# Altium PCB EQDirect.PcbDoc
Units mm, origin at the board's own origin, x right, y up, seen from the top; angles counter-clockwise.
Board outline 15 x 20 mm, 2 copper layers (Top Layer, Bottom Layer), stack 1.471 mm thick; 15 components, 12 nets, 64 pads, 20 vias.
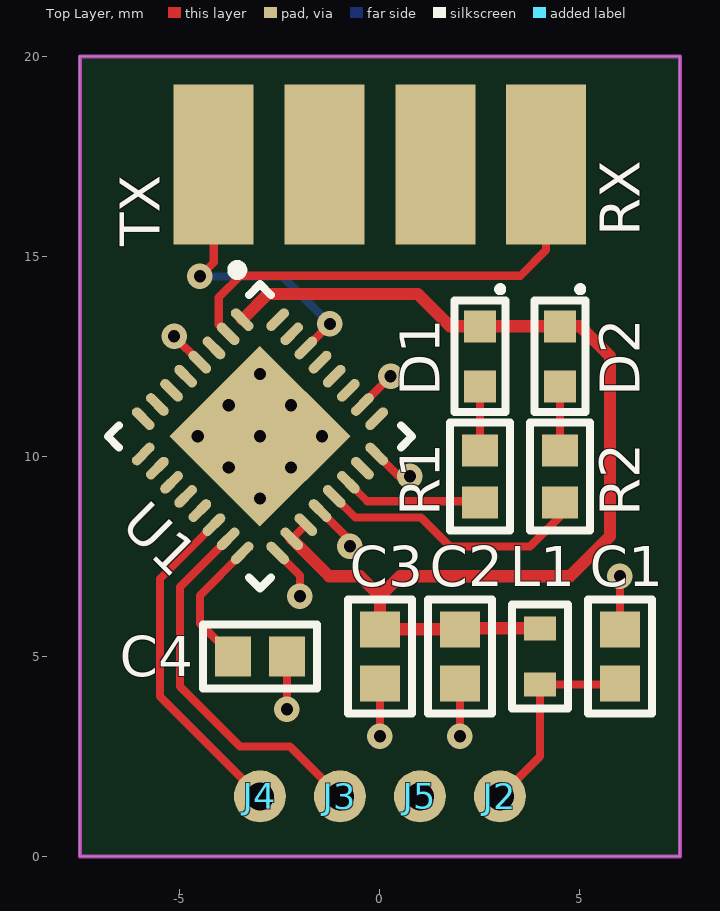
[diagram p0: Top Layer view]
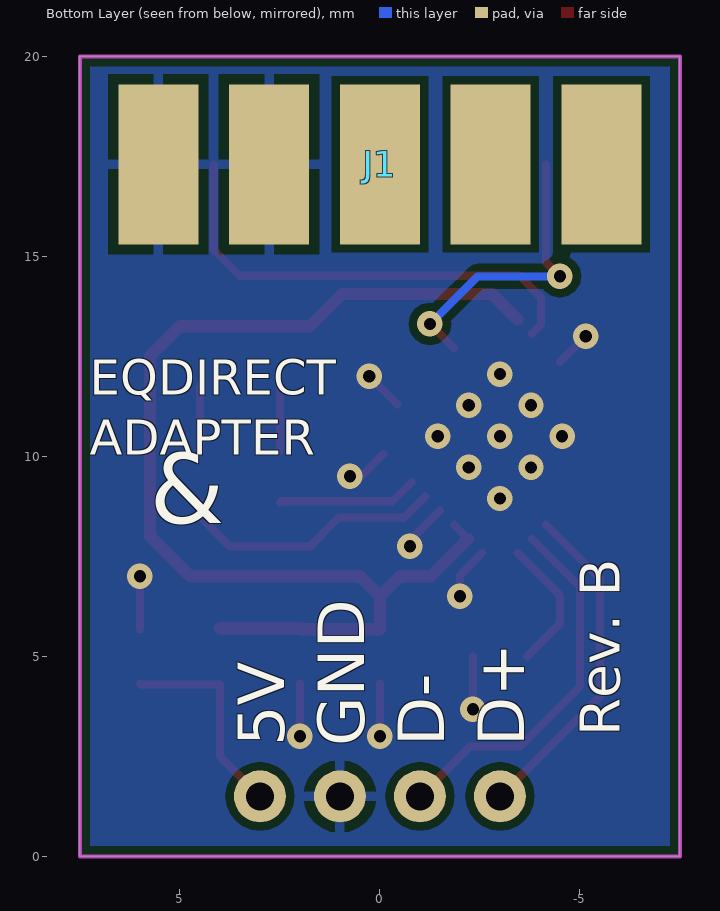
[diagram p1: Bottom Layer view, seen from below]
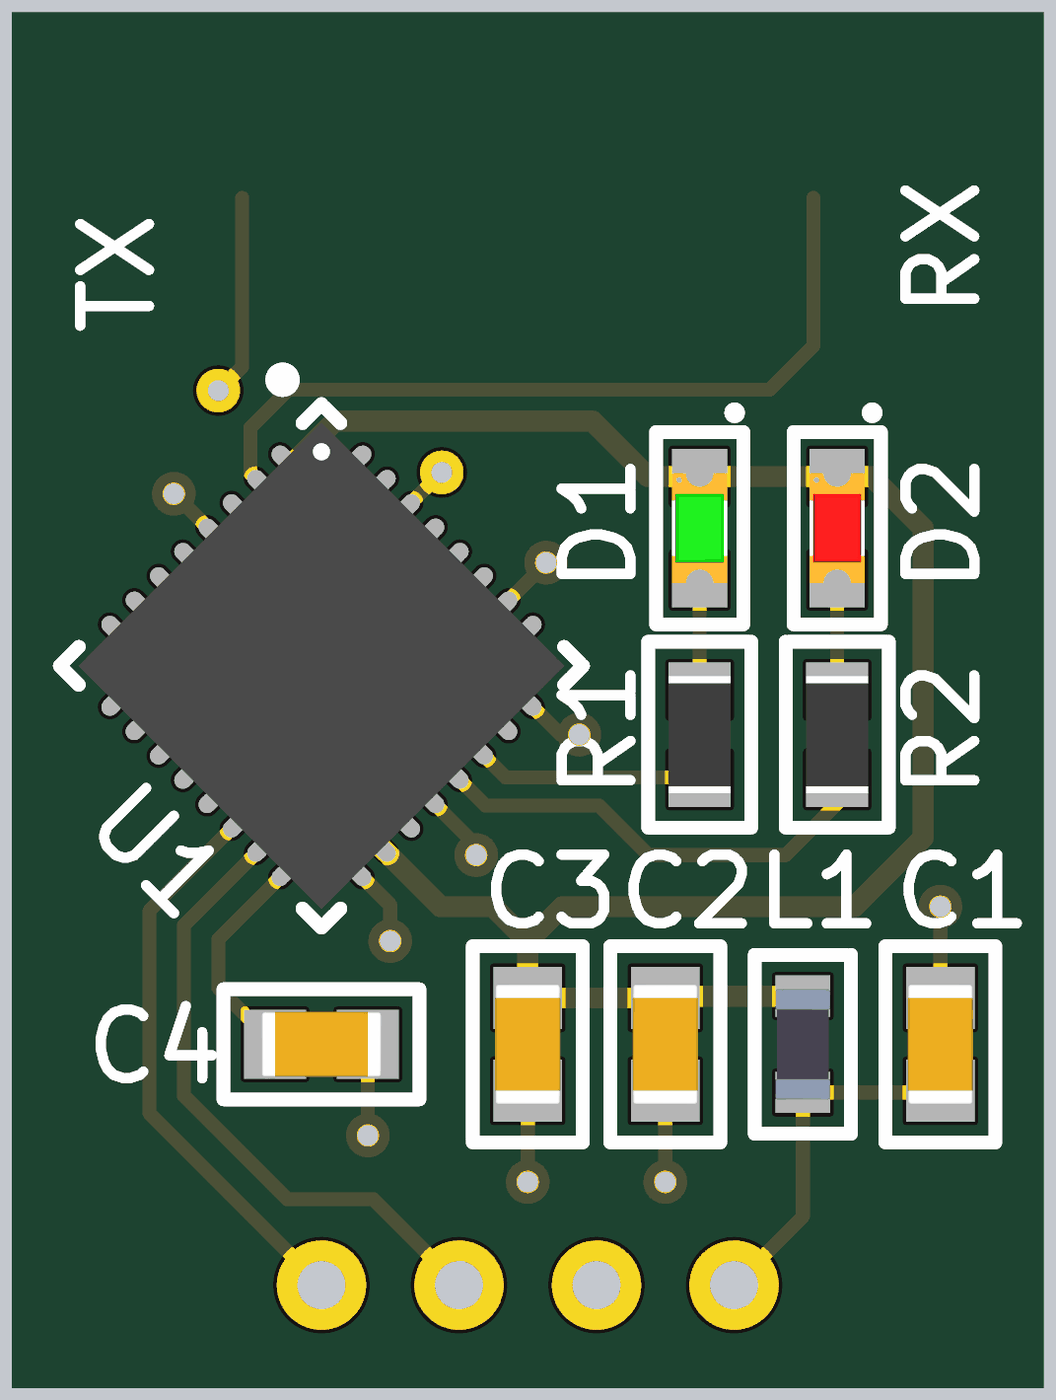
[diagram p2: 3D render of the assembled board from above, using the file's embedded part models]

## Layer stack, top to bottom
Top Solder: solder mask 0.0102, Solder Resist, Dk 3.5
Top Layer: signal copper 0.0356
Dielectric 1: dielectric 1.4, FR-4, Dk 4.8
Bottom Layer: signal copper 0.0356
Bottom Solder: solder mask 0.0102, Solder Resist, Dk 3.5

## Board outline
-7.5,0 7.5,0 7.5,20 -7.5,20

## Design rules (kind name [scope] priority, off if disabled: settings)
Clearance [All] p1: gap=0.203 ignorepadtopadclearanceinfootprint=FALSE
HoleSize [All] p1: absolutevalues=TRUE maxlimit=2.54 minlimit=0.3 maxpercent=80.000 minpercent=20.000
MinimumSolderMaskSliver [All] p1: minsoldermaskwidth=0.1
PolygonConnect PolygonConnect_VIA [IsVia] p1: connectstyle=Direct reliefconductorwidth=0.254 reliefentries=4 polygonreliefangle="90 Angle" airgapwidth=0.254
PolygonConnect [All] p2: connectstyle=Relief reliefconductorwidth=0.254 reliefentries=4 polygonreliefangle="90 Angle" airgapwidth=0.254
RoutingVias [All] p1: holewidth=0.305 width=0.635 viastyle="Through Hole" minholewidth=0.3 minwidth=0.508 maxholewidth=0.381 maxwidth=0.635
SilkToSilkClearance [All] p1: silktosilkclearance=0
SilkToSolderMaskClearance [IsPad] p1: minsilkscreentomaskgap=0.1 clearancetoexposedcopper=TRUE
SolderMaskExpansion [All] p1: expansion=0.051
Width [All] p1: maxlimit=0.305 minlimit=0.203 preferedwidth=0.203
26 further rules are at their usual default settings.

## Components (designator, comment, footprint, x,y, rotation, side; value= is the part's Value field where it differs from the comment)
C1 "100nF" C0603 6,5 r270 top
C2 "4u7" C0603 2,5 r90 top
C3 "100nF" C0603 0,5 r90 top
C4 "100nF" C0603 -3,5 r180 top
D1 "GREEN" LED_0603_GREEN 2.5,12.5 r270 top
D2 "RED" LED_0603_RED 4.5,12.5 r270 top
J1 "DB9 male edge connector" DB9-M-EDGE 0,26.3 r180 bottom
J2 "TH_PAD" TH_PAD 3,1.5 r0 top
J3 "TH_PAD" TH_PAD -1,1.5 r180 top
J4 "TH_PAD" TH_PAD -3,1.5 r180 top
J5 "TH_PAD" TH_PAD 1,1.5 r0 top
L1 "MZ1608-102Y" L0603 4,5 r270 top
R1 "280R" R0603 2.5,9.5 r90 top
R2 "280R" R0603 4.5,9.5 r90 top
U1 "FT232RQ" QFN50P500X500X100_HS-33N -3,10.5 r315 top

## Footprints (in the part's own frame and the unit in brackets; to place one, negate y for a bottom-side part, rotate by r counter-clockwise, add the part's x,y. Pads: shape width x height; smd on the part's side, far side on the other; paste and mask are expansions set on the pad)
C0603 [mm] "Chip Capacitor, Body 2.0x1.2mm, Height 1.0mm, IPC Medium Density"
  rect 0.9x1 smd: 1(-0.675,0) 2(0.675,0)
  silkscreen extent -1.43,-0.8 1.43,0.8, body extent -0.87,-0.47 0.88,0.48, height 0.95
DB9-M-EDGE [mm]
  rect 2x4 smd: 1(5.54,-9) 2(2.77,-9) 3(0,-9) 4(-2.77,-9) 5(-5.54,-9)
  rect 2x4 smd far side: 6(4.155,-9) 7(1.385,-9) 8(-1.385,-9) 9(-4.155,-9)
  body extent -15.41,-10.9 15.4,6.3, height 5.28
L0603 [mm]
  rect 0.6x0.8 smd: 1(-0.7,0) 2(0.7,0)
  silkscreen extent -1.3,-0.7 1.3,0.7, body extent -0.8,-0.4 0.8,0.4, height 0.8
LED_0603_GREEN [mm] "OSRAM Chipled 0805 GREEN"
  rect 0.8x0.8 smd: 1(-0.75,0) 2(0.75,0)
  silkscreen extent -1.73,-0.64 1.4,0.64, body extent -0.8,-0.4 0.8,0.4, height 0.6
LED_0603_RED [mm] "OSRAM Chipled 0805 RED"
  rect 0.8x0.8 smd: 1(-0.75,0) 2(0.75,0)
  silkscreen extent -1.73,-0.64 1.4,0.64, body extent -0.8,-0.4 0.8,0.4, height 0.6
QFN50P500X500X100_HS-33N [mm] "QFN, 32-Leads, Body 5,00x5,00mm, Pitch 0,50mm, Thermal Pad 3,20x3,20mm, IPC Medium Density"
  oval 0.7x0.25 smd: 1(-2.375,1.75) 2(-2.375,1.25) 3(-2.375,0.75) 4(-2.375,0.25) 5(-2.375,-0.25) 6(-2.375,-0.75) 7(-2.375,-1.25) 8(-2.375,-1.75) 17(2.375,-1.75) 18(2.375,-1.25) 19(2.375,-0.75) 20(2.375,-0.25) 21(2.375,0.25) 22(2.375,0.75) 23(2.375,1.25) 24(2.375,1.75)
  oval 0.25x0.7 smd: 9(-1.75,-2.375) 10(-1.25,-2.375) 11(-0.75,-2.375) 12(-0.25,-2.375) 13(0.25,-2.375) 14(0.75,-2.375) 15(1.25,-2.375) 16(1.75,-2.375) 25(1.75,2.375) 26(1.25,2.375) 27(0.75,2.375) 28(0.25,2.375) 29(-0.25,2.375) 30(-0.75,2.375) 31(-1.25,2.375) 32(-1.75,2.375)
  rect 3.2x3.2 smd: 33(0,0)
  silkscreen extent -3.46,-2.69 2.69,2.69, body extent -2.5,-2.5 2.51,2.51, height 1
R0603 [mm] "Chip Resistor, 2-Leads, Body 1,60x0,80mm, IPC Medium Density"
  rect 0.8x0.9 smd: 1(-0.65,0) 2(0.65,0)
  silkscreen extent -1.35,-0.75 1.35,0.75, body extent -0.85,-0.45 0.85,0.45, height 0.55
TH_PAD [mm]
  round 1.3 hole 0.7: 1(0,0)

## Part data
C1 C3 C4: library part C0603C104K5RACTU, "CAP CER 0.1UF 50V X7R 0603", Capacitance=0.10µF, Manufacturer=Kemet, Operating Temperature="-55°C ~ 125°C", Package / Case="0603 (1608 Metric)", Ratings=-, Supplier Part Number 1=399-5089-1-ND, Temperature Coefficient=X7R, Tolerance=±10%, Voltage - Rated=50V, Applications="General Purpose", Category=Capacitors, ComponentLink1Description=http://www.kemet.com/docfinder?Partnumber=C0603C104K5RACTU, ComponentLink1URL=http://www.kemet.com/docfinder?Partnumber=C0603C104K5RACTU, Features=-, Height - Seated (Max)=-, Lead Spacing=-, Lead Style=-, Manufacturer Part Number=C0603C104K5RACTU, Mounting Type="Surface Mount, MLCC", Packaging="Cut Tape (CT)", Part Number=C0603C104K5RACTU, Pricing 1="1=0.09, 10=0.037, 50=0.0198, 100=0.0167, 250=0.01372, 500=0.01174, 1000=0.00914 (EUR)", RoHS="RoHS Compliant", Size / Dimension="0.063\" L x 0.031\" W (1.60mm x 0.80mm)", Stock 1=1628757, Supplier 1=Digi-Key, Thickness (Max)="0.034\" (0.87mm)"
C2: library part GRM188R6YA475KE15D, "CAP CER 4.7UF 35V X5R 0603", Capacitance=4.7µF, Manufacturer="Murata Electronics North America", Operating Temperature="-55°C ~ 85°C", Package / Case="0603 (1608 Metric)", Ratings=-, Supplier Part Number 1=490-7205-2-ND, Temperature Coefficient=X5R, Tolerance=±10%, Voltage - Rated=35V, Applications="General Purpose", Category=Capacitors, ComponentLink1Description=http://www.murata.com/~/media/webrenewal/support/library/catalog/products/capacitor/mlcc/c02e.ashx, ComponentLink1URL=http://www.murata.com/~/media/webrenewal/support/library/catalog/products/capacitor/mlcc/c02e.ashx, Features=-, Height - Seated (Max)=-, Lead Spacing=-, Lead Style=-, Manufacturer Part Number=GRM188R6YA475KE15D, Mounting Type="Surface Mount, MLCC", Packaging="Tape & Reel (TR)", Part Number=GRM188R6YA475KE15D, Part Status=Active, Pricing 1="4000=0.05995, 8000=0.05671, 12000=0.05379, 28000=0.05185, 100000=0.04294 (EUR)", RoHS="RoHS Compliant", Size / Dimension="0.063\" L x 0.031\" W (1.60mm x 0.80mm)", Stock 1=428000, Supplier 1=Digi-Key, Thickness (Max)="0.031\" (0.80mm)"
D1: library part LTST-C190KGKT, "LED GREEN CLEAR 0603 SMD", Color=Green, Current - Test=20mA, Lens Color=Colorless, Manufacturer="Lite-On Inc.", Millicandela Rating=35mcd, Package / Case="0603 (1608 Metric)", Supplier Part Number 1=160-1435-1-ND, Voltage - Forward (Vf) (Typ)=2V, Category=Optoelectronics, ComponentLink1Description=http://optoelectronics.liteon.com/upload/download/DS22-2000-074/S_110_LTST-C190KGKT.pdf, ComponentLink1URL=http://optoelectronics.liteon.com/upload/download/DS22-2000-074/S_110_LTST-C190KGKT.pdf, Features=-, Height (Max)=0.80mm, Lens Style/Size="Rectangle with Flat Top, 1.10mm x 0.80mm", Lens Transparency=Clear, Manufacturer Part Number=LTST-C190KGKT, Mounting Type="Surface Mount", Packaging="Cut Tape (CT)", Part Number=LTST-C190KGKT, Pricing 1="1=0.24, 10=0.176, 25=0.1296, 100=0.0926, 250=0.063, 500=0.05556, 1000=0.04353 (EUR)", RoHS="RoHS Compliant", Size / Dimension="1.60mm L x 0.80mm W", Stock 1=1245030, Supplier 1=Digi-Key, Viewing Angle=130°, Wavelength - Dominant=571nm, Wavelength - Peak=574nm
D2: library part LTST-C190KRKT, "LED RED CLEAR 0603 SMD", Color=Red, Current - Test=20mA, Lens Color=Colorless, Manufacturer="Lite-On Inc.", Millicandela Rating=99mcd, Package / Case="0603 (1608 Metric)", Supplier Part Number 1=160-1436-1-ND, Voltage - Forward (Vf) (Typ)=2V, Category=Optoelectronics, ComponentLink1Description=http://optoelectronics.liteon.com/upload/download/DS-22-99-0151/S_110_LTST-C190KRKT.pdf, ComponentLink1URL=http://optoelectronics.liteon.com/upload/download/DS-22-99-0151/S_110_LTST-C190KRKT.pdf, Features=-, Height (Max)=0.80mm, Lens Style/Size="Rectangle with Flat Top, 1.10mm x 0.80mm", Lens Transparency=Clear, Manufacturer Part Number=LTST-C190KRKT, Mounting Type="Surface Mount", Packaging="Cut Tape (CT)", Part Number=LTST-C190KRKT, Pricing 1="1=0.24, 10=0.176, 25=0.1296, 100=0.0926, 250=0.063, 500=0.05556, 1000=0.04353 (EUR)", RoHS="RoHS Compliant", Size / Dimension="1.60mm L x 0.80mm W", Stock 1=1183099, Supplier 1=Digi-Key, Viewing Angle=130°, Wavelength - Dominant=631nm, Wavelength - Peak=639nm
J1: library part DB9_M_EDGE
L1: "FERRITE BEAD 1 KOHM 0603 1LN", Current Rating (Max)=100mA, DC Resistance (DCR) (Max)="600 mOhm", Impedance @ Frequency="1 kOhm @ 100MHz", Manufacturer="Bourns Inc.", Operating Temperature="-55°C ~ 125°C", Package / Case="0603 (1608 Metric)", Ratings=-, Supplier Part Number 1=MZ1608-102YCT-ND, Category=Filters, ComponentLink1Description=http://www.bourns.com/docs/Product-Datasheets/mgmumz.pdf, ComponentLink1URL=http://www.bourns.com/docs/Product-Datasheets/mgmumz.pdf, Filter Type="Power, Signal Line", Height (Max)="0.039\" (1.00mm)", Manufacturer Part Number=MZ1608-102Y, Mounting Type="Surface Mount", Number of Lines=1, Packaging="Cut Tape (CT)", Part Number=MZ1608-102Y, Part Status=Active, Pricing 1="1=0.09, 10=0.049, 25=0.0444, 50=0.0402, 100=0.0295, 250=0.02144, 500=0.01966, 1000=0.01696 (EUR)", RoHS="RoHS Compliant", Size / Dimension="0.063\" L x 0.031\" W (1.60mm x 0.80mm)", Stock 1=33555, Supplier 1=Digi-Key
R1 R2: library part RC0603FR-07280RL, "RES SMD 280 OHM 1% 1/10W 0603", Manufacturer=Yageo, Operating Temperature="-55°C ~ 155°C", Package / Case="0603 (1608 Metric)", Power (Watts)="0.1W, 1/10W", Resistance (Ohms)=280, Supplier Device Package=0603, Supplier Part Number 1=311-280HRCT-ND, Temperature Coefficient=±100ppm/°C, Tolerance=±1%, Category=Resistors, ComponentLink1Description=http://www.yageo.com/documents/recent/PYu-RC_Group_51_RoHS_L_6.pdf, ComponentLink1URL=http://www.yageo.com/documents/recent/PYu-RC_Group_51_RoHS_L_6.pdf, Composition="Thick Film", Failure Rate=-, Features="Moisture Resistant", Height - Seated (Max)="0.022\" (0.55mm)", Manufacturer Part Number=RC0603FR-07280RL, Packaging="Cut Tape (CT)", Part Number=RC0603FR-07280RL, Part Status=Active, Pricing 1="1=0.09, 10=0.012, 25=0.0088, 50=0.0066, 100=0.0049, 250=0.00372, 500=0.00298, 1000=0.0022 (EUR)", RoHS="RoHS Compliant", Size / Dimension="0.063\" L x 0.031\" W (1.60mm x 0.80mm)", Stock 1=47, Supplier 1=Digi-Key
U1: library part FT232RQ-REEL, "IC USB FS SERIAL UART 32-QFN", Case/Package="QFN EP", Manufacturer=FTDI, Max Operating Temperature=85°C, Max Supply Voltage=5.25V, Min Operating Temperature=-40°C, Min Supply Voltage=3.3V, Operating Supply Current=15mA, Operating Supply Voltage=5V, Package Quantity=6000, Supplier Part Number 1=768-1008-1-ND, ComponentLink1Description=https://datasheet.ciiva.com/1505/1647396-1505445.pdf, ComponentLink1URL=https://datasheet.ciiva.com/1505/1647396-1505445.pdf, ComponentLink2Description=https://datasheet.ciiva.com/26841/ft232rq-reel-26841082.pdf, ComponentLink2URL=https://datasheet.ciiva.com/26841/ft232rq-reel-26841082.pdf, ComponentLink3Description=https://datasheet.ciiva.com/15150/getdatasheetpartid-644721-15150509.pdf, ComponentLink3URL=https://datasheet.ciiva.com/15150/getdatasheetpartid-644721-15150509.pdf, ComponentLink4Description=https://datasheet.ciiva.com/4787/ds-ft232r-4787663.pdf, ComponentLink4URL=https://datasheet.ciiva.com/4787/ds-ft232r-4787663.pdf, ComponentLink5Description=https://datasheet.ciiva.com/16438/ds-ft232r-16438555.pdf, ComponentLink5URL=https://datasheet.ciiva.com/16438/ds-ft232r-16438555.pdf, ComponentLink6Description=https://datasheet.ciiva.com/1787/ds-ft232r-1787042.pdf, ComponentLink6URL=https://datasheet.ciiva.com/1787/ds-ft232r-1787042.pdf, ComponentLink7Description=https://datasheet.ciiva.com/1787/ds-ft232r-1787041.pdf, ComponentLink7URL=https://datasheet.ciiva.com/1787/ds-ft232r-1787041.pdf, Data Rate=12Mbps, Interface=UART, Lead Free="Lead Free", Length=5mm, Manufacturer Part Number=FT232RQ-REEL, Mount="Surface Mount", Number of Channels=1, Number of Pins=32, Packaging="Tape and Reel", Part Number=FT232RQ-REEL, Pricing 1="1=4.5, 10=4.05, 100=3.65, 250=3.25, 500=2.85, 1000=2.65, 2500=2.35 (USD)", Radiation Hardening=No, Stock 1=94833, Supplier 1=Digi-Key, Weight=0.006653oz, Width=5mm

## Via types
v1: diameter 0.635, hole 0.305, Top Layer to Bottom Layer, tented top, 9 vias
v2: diameter 0.635, hole 0.305, Top Layer to Bottom Layer, tented both sides, 9 vias
v3: diameter 0.635, hole 0.305, Top Layer to Bottom Layer, 2 vias

## Nets (pads, with @x,y where several pads share a name; then routed paths per layer and width w, separated by ;. In a path a pad name is that pad's centre, name@x,y a point inside that pad or via, vN(x,y) a via of type N, cw(c..) or ccw(c..) an arc to the next point about the centre after c; other vN are vias at no path point)
D+: J4.1 U1.14 | length 8.9
  Top Layer w0.203: U1.14 -5.5,6.939 -5.5,4 J4.1 J4.1@-3,2
D-: J3.1 U1.15 | length 9.6
  Top Layer w0.203: U1.15 -5,6.732 -5,4.25 -3.5,2.75 -2.25,2.75 J3.1 J3.1@-1,1.75
EQ_RX: J1.6 U1.30 | length 7.5
  Top Layer w0.203: v3(-4.5,14.5) -4.155,14.845 J1.6 ; U1.30 v3(-1.25,13.311)
  Bottom Layer w0.203: v3(-4.5,14.5) -2.439,14.5 v3(-1.25,13.311)
EQ_TX: J1.9 U1.2 | length 11.8
  Top Layer w0.203: U1.2 -4.031,13.299 -4.031,13.969 -3.486,14.514 3.514,14.514 4.155,15.155 J1.9
GND: C1.1 C2.1 C3.1 C4.1 J1.4 J1.5 J5.1 U1.4 U1.17 U1.20 U1.24 U1.26 U1.33 | length 10.8
  Top Layer w0.203: v2(-5.146,13) U1.4 ; U1.17 -2,7.025 v2(-2,6.5) ; v2(-2.325,3.675) C4.1 ; U1.20 -0.75,7.896 v2(-0.75,7.75) ; U1.26 v2(0.268,12) ; U1.24 0.475,9.5 v2(0.75,9.5) ; v2(0,3) C3.1 ; v2(2,3) C2.1 ; C1.1 v2(6,7)
  other v1: -3,8.944 -3.778,9.722 -2.222,9.722 -4.556,10.5 -3,10.5 -1.444,10.5 -3.778,11.278 -2.222,11.278 -3,12.056
NetC4_2: C4.2 U1.16 | length 3.4
  Top Layer w0.203: C4.2 -4.5,5.825 -4.5,6.525 U1.16
NetD1_2: D1.2 R1.2 | length 1.6
  Top Layer w0.203: R1.2 D1.2
NetD2_2: D2.2 R2.2 | length 1.6
  Top Layer w0.203: R2.2 D2.2
RX_LED: R2.1 U1.21 | length 6.8
  Top Layer w0.203: U1.21 -0.618,8.471 1.029,8.471 1.75,7.75 3.75,7.75 4.5,8.5 R2.1
TX_LED: R1.1 U1.22 | length 3.5
  Top Layer w0.203: U1.22 -0.317,8.878 2.472,8.878 R1.1
VCC: C2.2 C3.2 D1.1 D2.1 L1.1 U1.1 U1.18 U1.19 | length 29.1
  Top Layer w0.203: U1.18 U1.19
  Top Layer w0.305: U1.1 -2.802,14.057 0.943,14.057 1.75,13.25 D1.1 D2.1 5,13.25 5.75,12.5 5.75,8 4.75,7 0.5,7 0,6.5 ; U1.18 -1.268,7 -0.5,7 0,6.5 ; C2.2@2,5.7 C2.2@2.025,5.7 ; L1.1 C2.2@2.025,5.7 ; 0,6.5 C3.2 C2.2 C2.2@2.025,5.7
VUSB: C1.2 J2.1 L1.2 | length 5.2
  Top Layer w0.203: J2.1 4,2.5 L1.2 5.975,4.3 C1.2
pads on no net: J1.1 J1.2 J1.3 J1.7 J1.8 U1.3 U1.5 U1.6 U1.7 U1.8 U1.9 U1.10 U1.11 U1.12 U1.13 U1.23 U1.25 U1.27 U1.28 U1.29 U1.31 U1.32

## Polygon pours and split planes (outlines as drawn)
GND on Bottom Layer "GND_L02_P002" (solid, remove dead copper, pour order 2): -7.5,0 7.5,0 7.5,20 -7.5,20

## Keep-outs
Keep-Out Layer:
  the board outline again, w0.1

## Silkscreen, mask and mechanical layers (free items; w line width, h text height)
Top Overlay:
  text "RX" at 6.5,15.5 h1 r90
  text "TX" at -5.5,15.25 h1 r90
Bottom Overlay:
  text "EQDIRECT / ADAPTER" at 7.25,9.75 h1.5
  text "&" at 5.75,7.75 h3
  text "Rev. B" at -6,3 h1 r270
  text "D+" at -4,2.75 h2 r270
  text "D-" at -2,2.75 h2 r270
  text "GND" at 0,2.75 h2 r270
  text "5V" at 2,2.75 h2 r270